# Altium PCB JTAGHub.PcbDoc
Units mm, origin at the board's own origin, x right, y up, seen from the top; angles counter-clockwise.
Board outline 51.42 x 40.33 mm, 2 copper layers (Top Layer, Bottom Layer); 4 components, 11 nets, 37 pads, 0 vias.
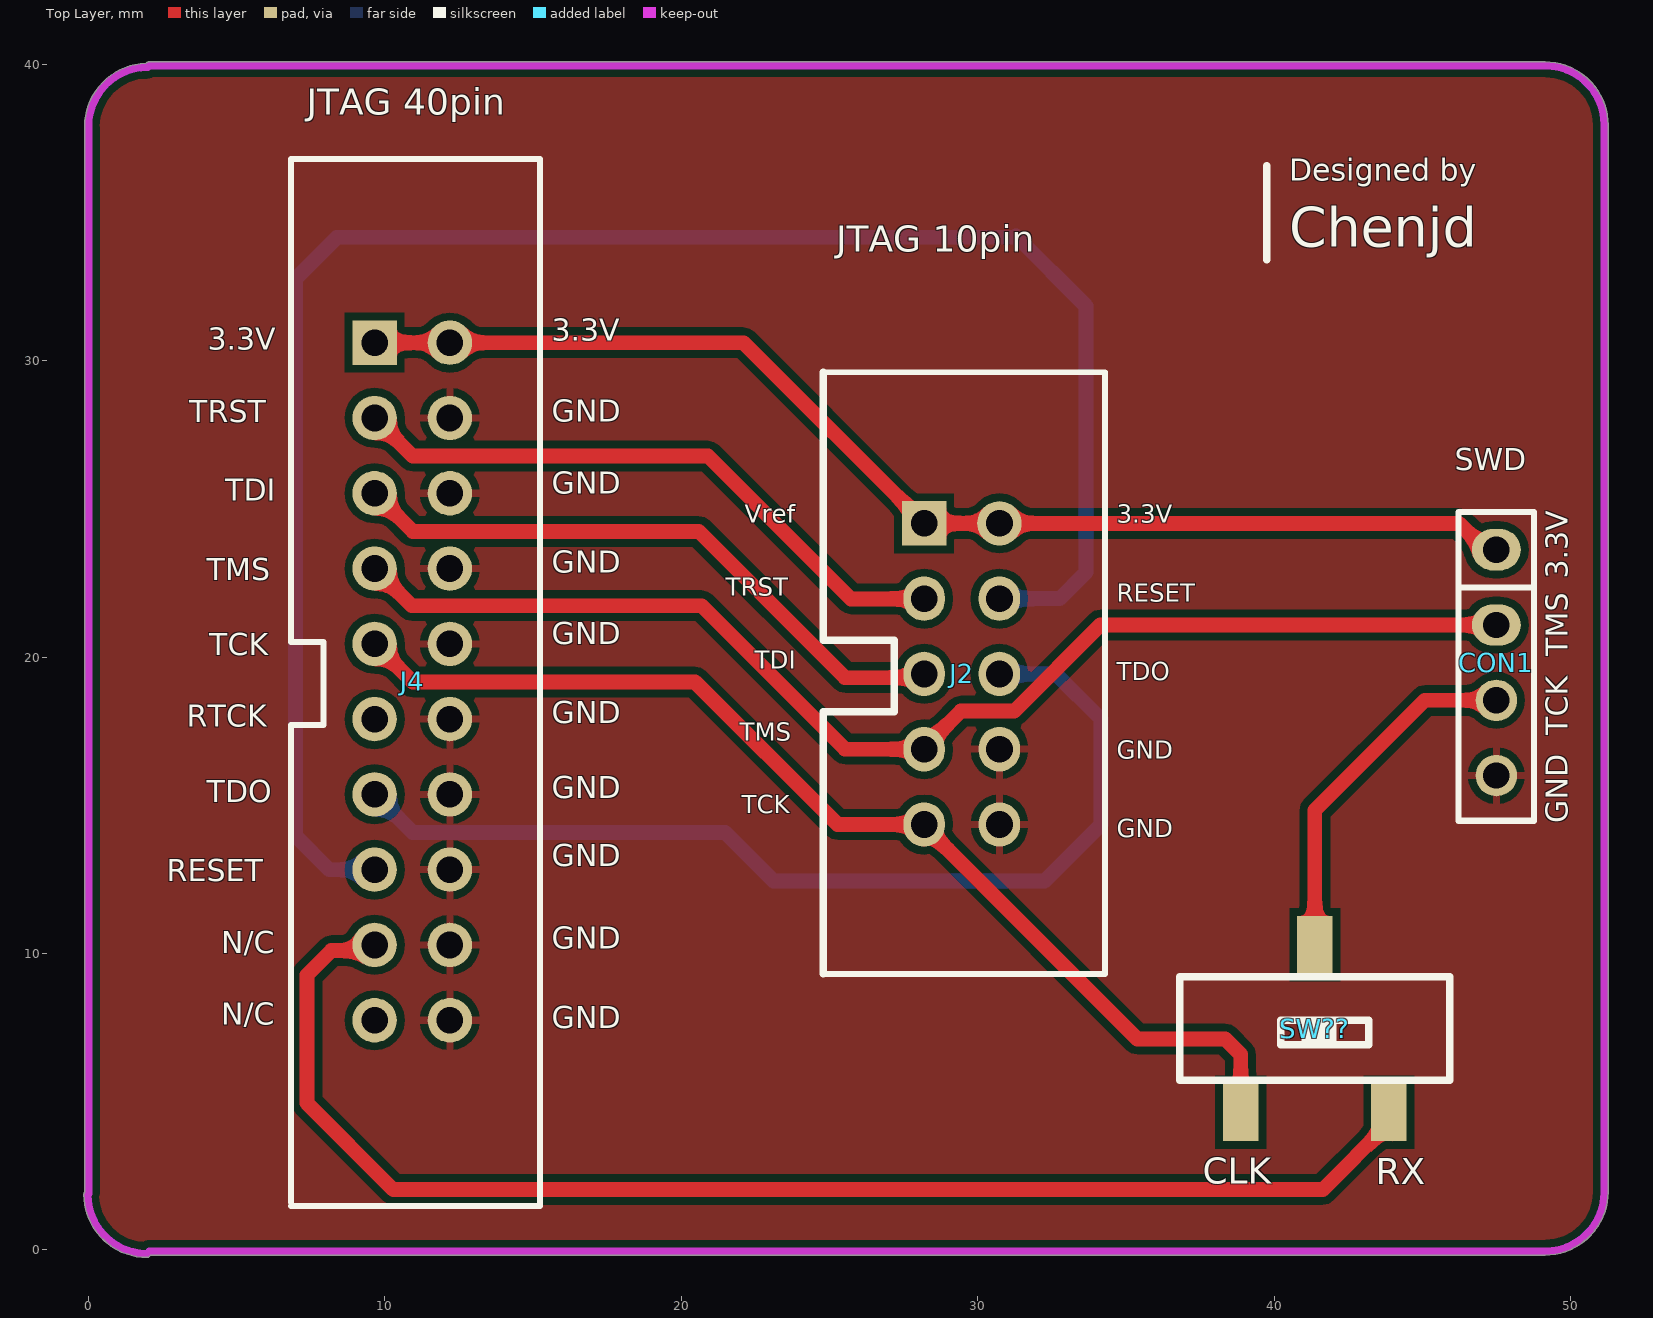
[diagram p0: Top Layer view]
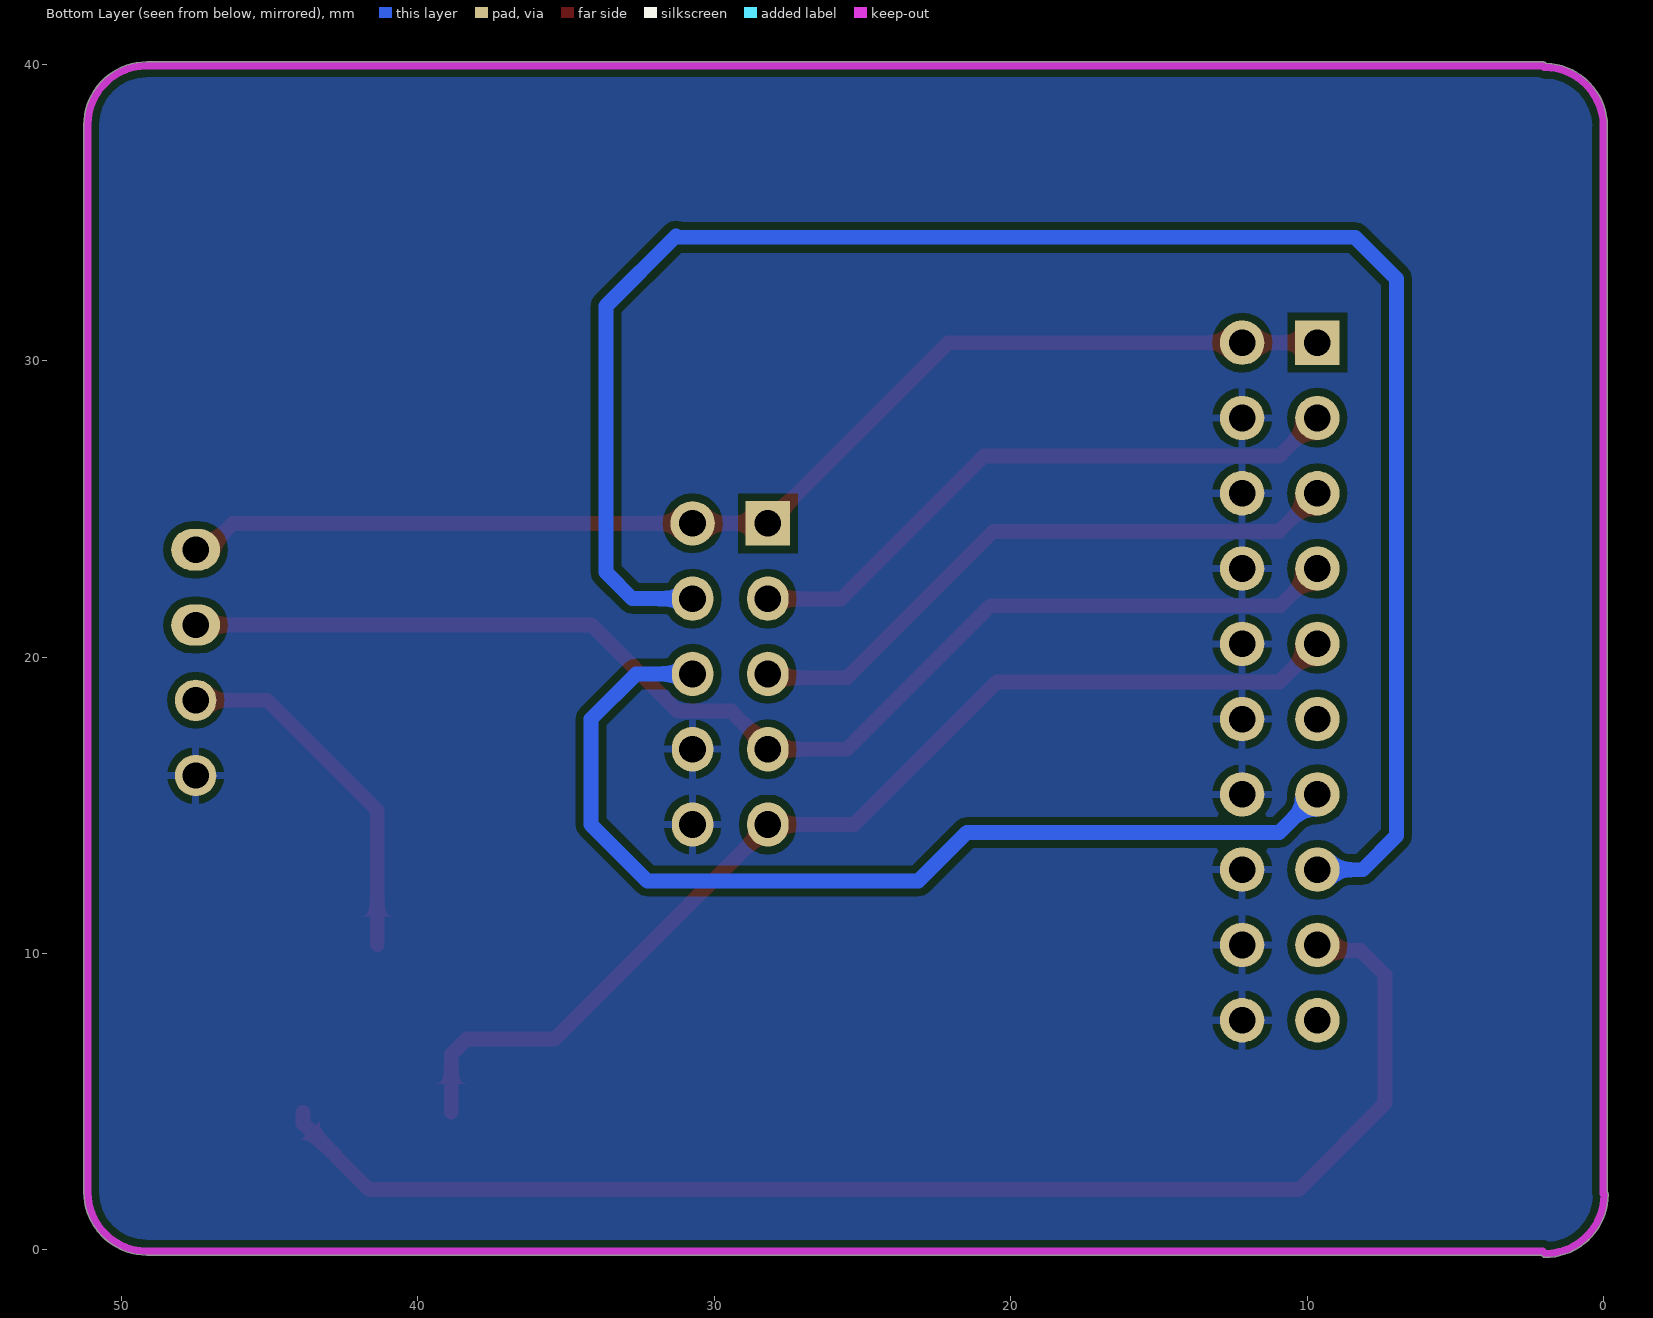
[diagram p1: Bottom Layer view, seen from below]

## Layer stack, top to bottom
Top Solder: solder mask 0.0102, Solder Resist, Dk 3.5
Top Layer: signal copper 0.0356
Dielectric 1: dielectric 0.32, FR-4, Dk 4.8
Bottom Layer: signal copper 0.0356
Bottom Solder: solder mask 0.0102, Solder Resist, Dk 3.5

## Board outline
-0.155,1.873 cw(c-0.028,1.873) -0.127,1.953 -0.127,37.906 cw(c2,37.906) 1.932,40.032 cw(c2.032,39.953) 2.032,40.08 49.142,40.08 cw(c49.142,37.953) 51.269,37.953 51.269,1.953 cw(c49.142,1.953) 49.142,-0.174 2.09,-0.174 cw(c1.972,-0.127) 1.972,-0.254 cw(c1.972,1.873)

## Design rules (kind name [scope] priority, off if disabled: settings)
Clearance [All] p1: gap=0.254 ignorepadtopadclearanceinfootprint=FALSE except(0: Arc-Hole Track-Hole SMDPad-Hole THPad-Hole Via-Hole Fill-Hole Poly-Hole Region-Hole Text-Hole)
PolygonConnect [All] p1: connectstyle=Relief reliefconductorwidth=0.254 reliefentries=4 polygonreliefangle="90 Angle" airgapwidth=0.254
RoutingVias [All] p1: holewidth=0.711 width=1.27 viastyle="Through Hole" minholewidth=0.711 minwidth=1.27 maxholewidth=0.711 maxwidth=1.27
SolderMaskExpansion [All] p1: expansion=0.102 istentingtop=FALSE
Width [All] p1: maxlimit=0.554 minlimit=0.254 preferedwidth=0.254
30 further rules are at their usual default settings.

## Components (designator, comment, footprint, x,y, rotation, side; value= is the part's Value field where it differs from the comment)
CON1 "JLINK-SWD" Jlink-SWD 47.498,23.622 r270 top
J2 "JTAG-10P" JTAG-10pin 19.894,18.411 r0 top
J4 "Female HDR2X10" Jlink 7.628,18.407 r0 top
SW?? "TA-3530A-A2" SW-3P 41.148,7.366 r0 top

## Footprints (in the part's own frame and the unit in brackets; to place one, negate y for a bottom-side part, rotate by r counter-clockwise, add the part's x,y. Pads: shape width x height; smd on the part's side, far side on the other; paste and mask are expansions set on the pad)
Jlink [mm] "jlink的母头"
  rect 1.5x1.5 hole 0.9: 1(2.024,12.2)
  round 1.5 hole 0.9: 2(4.564,12.2) 3(2.024,9.66) 4(4.564,9.66) 5(2.024,7.12) 6(4.564,7.12) 7(2.024,4.58) 8(4.564,4.58) 9(2.024,2.04) 10(4.564,2.04) 11(2.024,-0.5) 12(4.564,-0.5) 13(2.024,-3.04) 14(4.564,-3.04) 15(2.024,-5.58) 16(4.564,-5.58) 17(2.024,-8.12) 18(4.564,-8.12) 19(2.024,-10.66) 20(4.564,-10.66)
  silkscreen extent -0.8,-16.93 7.6,18.4, body extent 0.75,-11.93 5.83,13.47, height 7.58
Jlink-SWD [mil] "Jlink下载接口"
  oval 55x65 hole 35: 1(0,0) 2(100,0)
  round 55 hole 35: 3(200,0) 4(300,0)
  silkscreen extent -50,-50 360,50, body extent -45,-55 355,45, height 453
JTAG-10pin [mm] "10pin JTAG"
  rect 1.5x1.5 hole 0.9: 1(8.3,6.1)
  round 1.5 hole 0.9: 2(10.84,6.1)
  oval 1.397x1.5 hole 0.9: 3(8.3,3.56) 4(10.84,3.56) 5(8.3,1.02) 6(10.84,1.02) 7(8.3,-1.52) 8(10.84,-1.52) 9(8.3,-4.06) 10(10.84,-4.06)
  silkscreen extent 4.9,-9.1 14.4,11.2, body extent 5.32,-9.13 14.17,11.17, height 9.13
SW-3P [mm] "2选1滑动开关"
  rect 1.2x1.95 smd paste+0 mask+0.051: 1(-2.273,-2.724) 2(0.227,2.926) 3(2.727,-2.724)
  silkscreen extent -4.32,-1.65 4.78,1.85

## Part data
CON1: "SWD下载接口"
J2: "10pin JTAG"
SW??: library part SW-3P, "2选1滑动开关", JLCPCB Part Class="Extended Part", LCSC Part Name=滑动开关9.1*3.5*3.0mm贴片正拨三脚二档, Manufacturer=Yuandi(元迪), Add into BOM=yes, Convert to PCB=yes, Datasheet=https://atta.szlcsc.com/upload/public/pdf/source/20200415/C514026_8B08460025BDC38443E709528B1B4516.pdf, Device=TA-3530A-A2, Manufacturer Part=TA-3530A-A2, Name=TA-3530A-A2, Supplier=LCSC, Supplier Footprint=SMD,9.1x3.5mm, Supplier Part=C514025, Symbol=TA-3530A-A2

## Nets (pads, with @x,y where several pads share a name; then routed paths per layer and width w, separated by ;. In a path a pad name is that pad's centre, name@x,y a point inside that pad or via, vN(x,y) a via of type N, cw(c..) or ccw(c..) an arc to the next point about the centre after c; other vN are vias at no path point)
GND: CON1.4 J2.8 J2.10 J4.4 J4.6 J4.8 J4.10 J4.12 J4.14 J4.16 J4.18 J4.20
RESTE: J2.4 J4.15 | length 62.6
  Bottom Layer w0.5: J4.15@9.652,12.954 J4.15 8.128,12.827 6.985,13.97 6.985,32.766 8.382,34.163 31.242,34.163 31.289,34.21 33.655,31.844 33.655,22.86 32.766,21.971 J2.4
RTCK: J4.11
swd_clk: CON1.3 SW??.2 | length 12.2
  Top Layer w0.5: SW??.2 41.375,14.832 45.085,18.542 CON1.3
TCLK: J2.9 J4.9 SW??.1 | length 36.9
  Top Layer w0.5: J4.9 10.938,19.161 20.463,19.161 25.273,14.351 J2.9 28.194,14.299 35.381,7.112 38.354,7.112 38.875,6.591 SW??.1
TDI: J2.5 J4.5 | length 21.2
  Top Layer w0.5: J4.5 10.938,24.241 20.59,24.241 25.527,19.304 28.067,19.304 J2.5
TDO: J2.6 J4.13 | length 34.1
  Bottom Layer w0.5: J4.13 10.938,14.081 21.479,14.081 23.114,12.446 32.258,12.446 34.163,14.351 34.163,17.907 32.639,19.431 J2.6
TMS: CON1.2 J2.7 J4.7 | length 42.1
  Top Layer w0.5: J4.7 10.906,21.733 20.685,21.733 25.527,16.891 J2.7 28.194,16.943 29.428,18.177 31.232,18.177 34.137,21.082 CON1.2
TRST: J2.3 J4.3 | length 21.1
  Top Layer w0.5: J4.3 10.938,26.781 20.905,26.781 25.723,21.963 28.186,21.963 J2.3
TTL_RX: J4.17 SW??.3 | length 46
  Top Layer w0.5: J4.17 9.461,10.096 8.191,10.096 7.366,9.271 7.366,4.953 10.287,2.032 41.64,2.032 43.875,4.267 SW??.3
VCC: CON1.1 J2.1 J2.2 J4.1 J4.2 | length 40.7
  Top Layer w0.5: J4.1 J4.2 22.098,30.607 J2.1 J2.2 46.239,24.511 47.128,23.622 CON1.1
pads on no net: J4.19

## Polygon pours and split planes (outlines as drawn)
GND on Top Layer "GND_L01_P000" (solid, pour order 0): 0,0 0.127,-0.127 51.435,-0.127 51.435,40.132 0,40.132
GND on Bottom Layer "GND_L02_P001" (solid, pour order 1): 0,0 51.435,0 51.435,40.259 0,40.259

## Keep-outs
Keep-Out Layer:
  lines w0.254: -0.028,1.873 ccw(c1.972,1.873) 1.972,-0.127 ; 0,1.901 0,2.286 0,37.906 cw(c2,37.906) 2,39.906 ; 2.032,39.953 49.142,39.953 cw(c49.142,37.953) 51.142,37.953 51.142,1.953 cw(c49.142,1.953) 49.142,-0.047 4.142,-0.047 2.052,-0.047

## Silkscreen, mask and mechanical layers (free items; w line width, h text height)
Top Overlay:
  lines w0.254: 39.751,33.401 39.751,36.576
  text "JTAG 40pin" at 7.363,37.989 h1.52
  text "Designed by" at 40.513,35.814 h1.27
  text "Chenjd" at 40.513,33.401 h2.29
  text "JTAG 10pin" at 25.223,33.367 h1.52
  text "SWD" at 46.101,26.048 h1.27
  text "3.3V" at 50.164,22.648 h1.27 r90
  text "TMS" at 50.164,20.022 h1.27 r90
  text "TCK" at 50.164,17.355 h1.27 r90
  text "GND" at 50.164,14.393 h1.27 r90
  text "CLK" at 37.592,1.921 h1.52
  text "RX" at 43.434,1.905 h1.52

## Text inside footprints (layer, text, board x,y; h text height)
J2: Top Overlay "Vref" at 22.138,24.322 h1.02; Top Overlay "3.3V" at 34.694,24.322 h1.02; Top Overlay "TRST" at 21.494,21.872 h1.02; Top Overlay "RESET" at 34.694,21.672 h1.02; Top Overlay "TDO" at 34.694,19.022 h1.02; Top Overlay "TDI" at 22.474,19.411 h1.02; Top Overlay "GND" at 34.694,16.372 h1.02; Top Overlay "GND" at 34.694,13.722 h1.02; Top Overlay "TMS" at 21.98,16.972 h1.02; Top Overlay "TCK" at 22.037,14.522 h1.02
J4: Top Overlay "N/C" at 4.483,7.35 h1.27; Top Overlay "N/C" at 4.483,9.75 h1.27; Top Overlay "GND" at 15.628,27.679 h1.27; Top Overlay "GND" at 15.628,25.266 h1.27; Top Overlay "GND" at 15.628,22.599 h1.27; Top Overlay "GND" at 15.628,20.186 h1.27; Top Overlay "GND" at 15.628,17.519 h1.27; Top Overlay "GND" at 15.628,14.979 h1.27; Top Overlay "GND" at 15.628,12.693 h1.27; Top Overlay "GND" at 15.628,9.899 h1.27; Top Overlay "GND" at 15.628,7.232 h1.27; Top Overlay "3.3V" at 15.628,30.421 h1.27; Top Overlay "3.3V" at 4.028,30.121 h1.27; Top Overlay "TRST" at 3.393,27.676 h1.27; Top Overlay "TDI" at 4.607,25.024 h1.27; Top Overlay "TMS" at 3.995,22.342 h1.27; Top Overlay "TCK" at 4.065,19.802 h1.27; Top Overlay "RTCK" at 3.307,17.389 h1.27; Top Overlay "TDO" at 3.987,14.849 h1.27; Top Overlay "RESET" at 2.633,12.182 h1.27